# Altium PCB Controller.PcbDoc
Units mm, origin at the board's own origin, x right, y up, seen from the top; angles counter-clockwise.
Board outline 84.93 x 83.99 mm, 2 copper layers (Top Layer, Bottom Layer), stack 1.671 mm thick; 58 components, 38 nets, 184 pads, 51 vias.
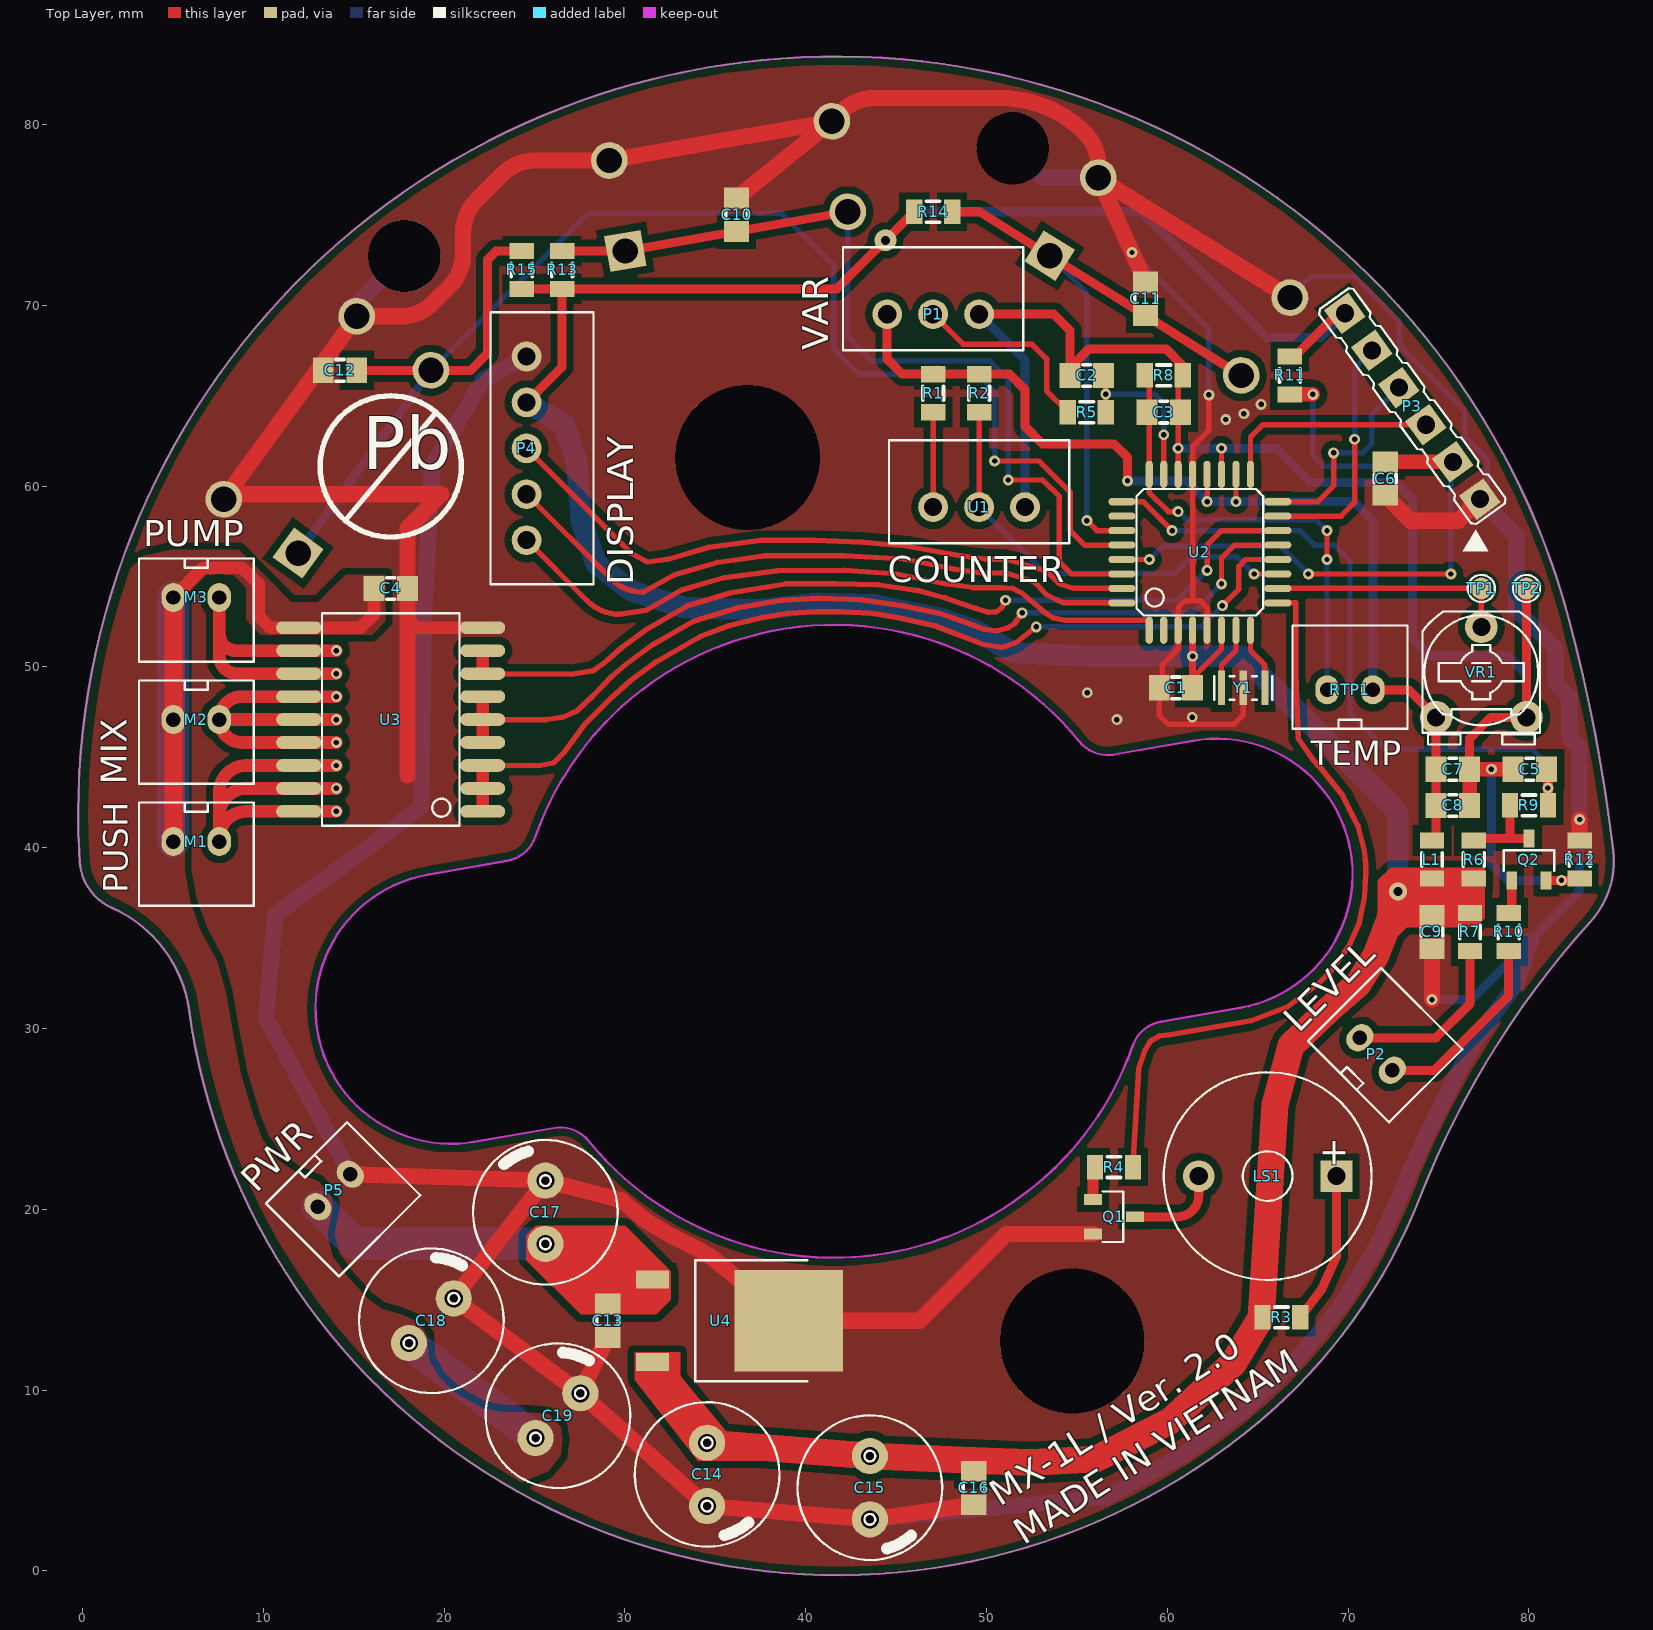
[diagram p0: Top Layer view]
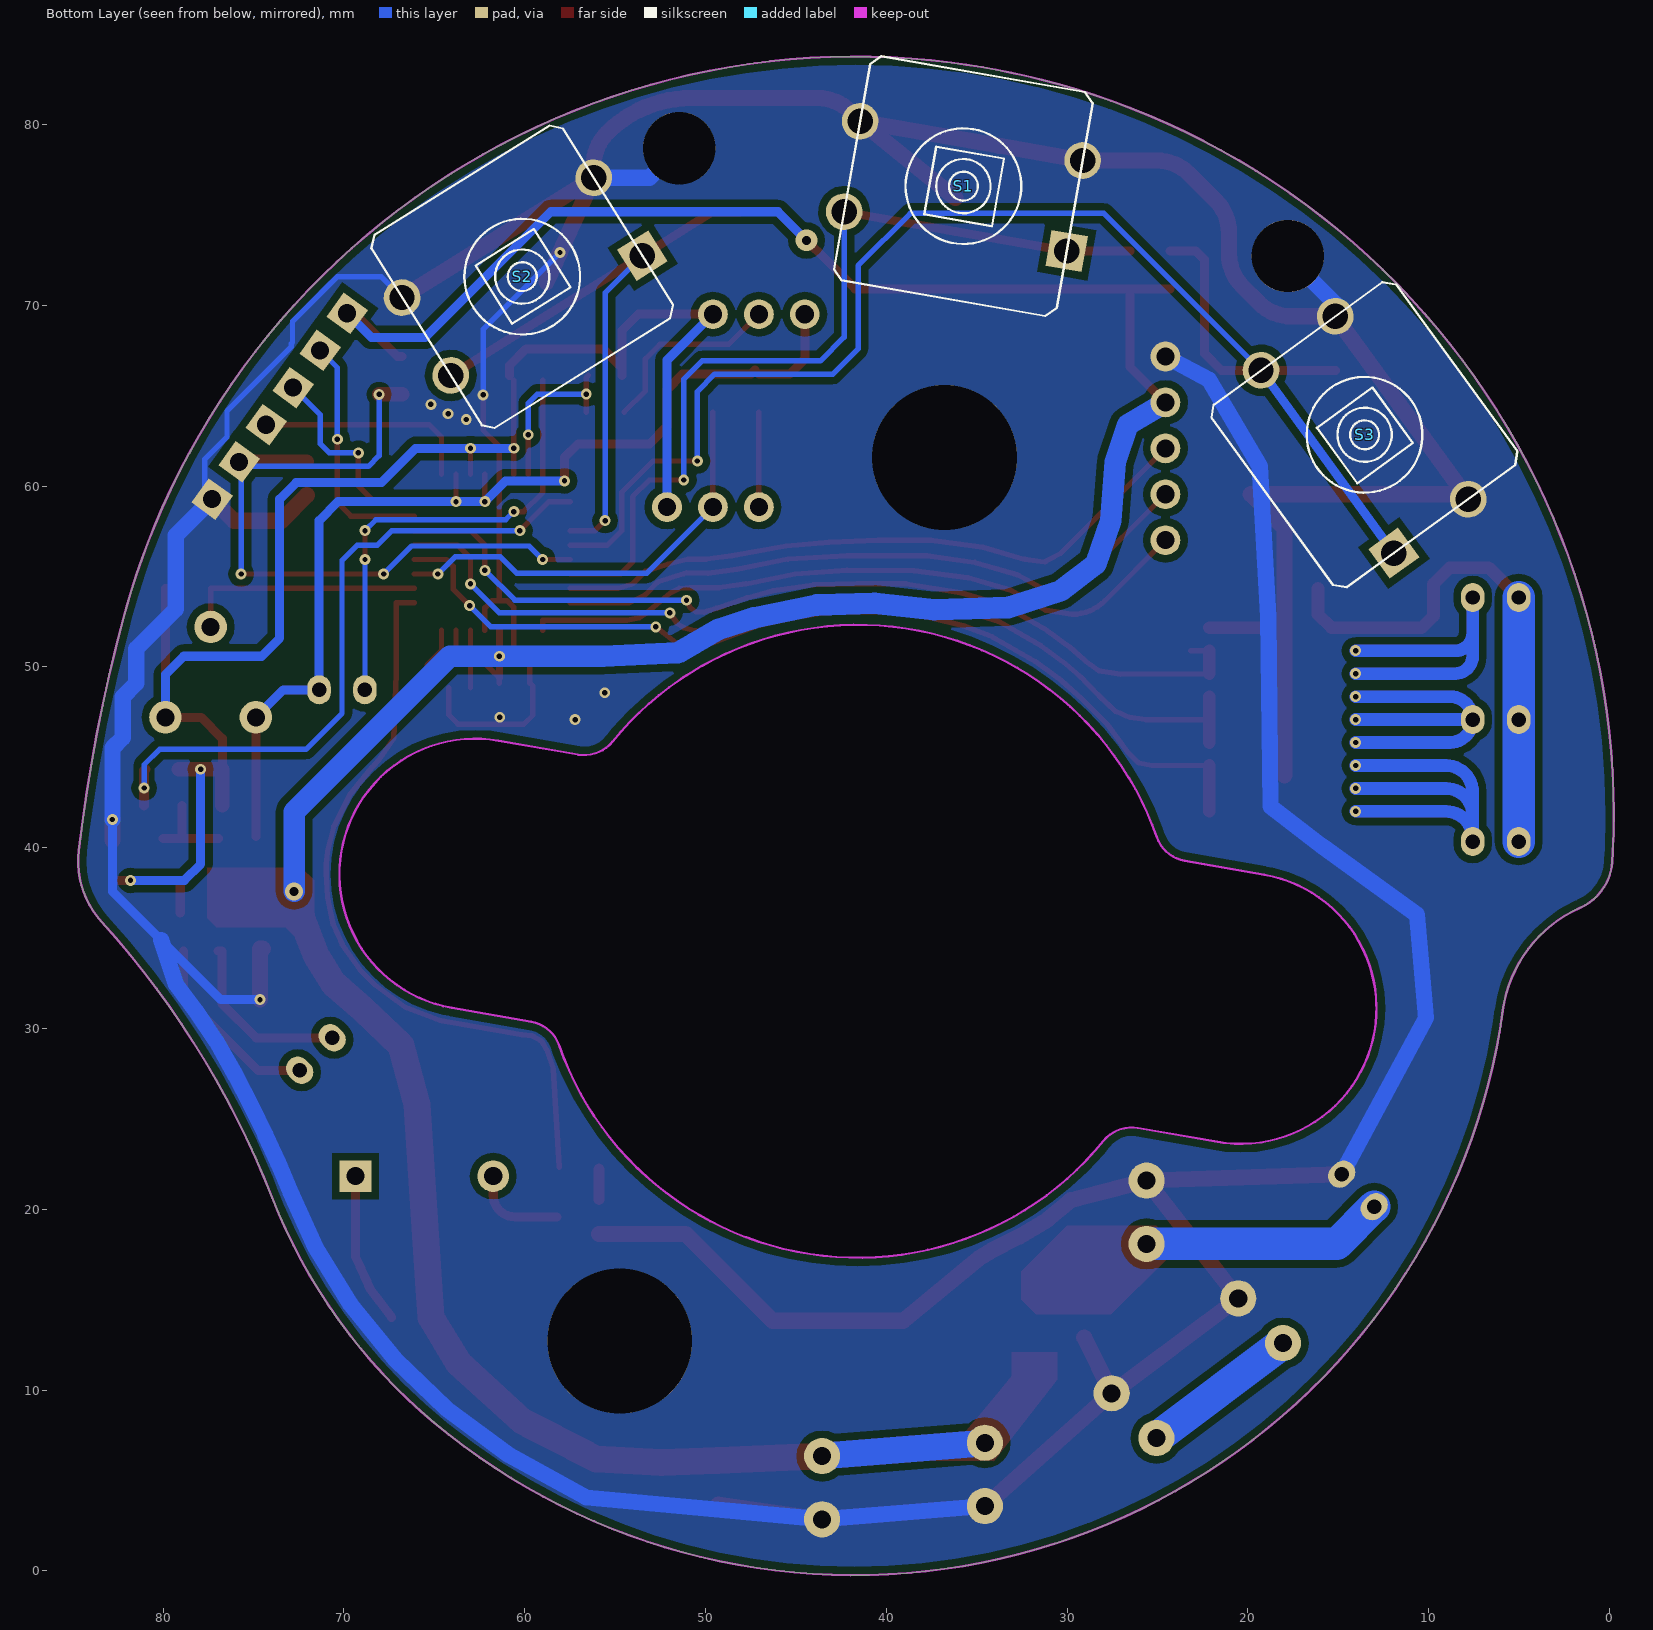
[diagram p1: Bottom Layer view, seen from below]

## Layer stack, top to bottom
Top Solder: solder mask 0.0102, Solder Resist, Dk 3.5
Top Layer: signal copper 0.0356
Dielectric1: dielectric 1.6, FR-4, Dk 4.8
Bottom Layer: signal copper 0.0356
Bottom Solder: solder mask 0.0102, Solder Resist, Dk 3.5

## Board outline
1.622,36.677 cw(c-1.346,29.992) 5.706,31.932 cw(c-1.363,29.992) 5.897,31 ccw(c41.771,35.981) 28.731,2.192 ccw(c41.771,35.981) 64.998,8.192 ccw(c45.151,31.937) 73.975,20.673 cw(c120.149,2.629) 83.399,35.902 ccw(c79.693,39.258) 84.658,39.846 ccw(c-6.031,29.097) 82.208,52.633 ccw(c41.185,41.694) 81.477,55.077 ccw(c41.608,41.836) 80.039,58.804 ccw(c41.69,41.814) 36.399,83.422 ccw(c41.795,41.305) 33.944,83.034 ccw(c41.789,41.313) 31.408,82.477 ccw(c41.678,41.745) 27.587,81.317 ccw(c41.708,41.822) -0.185,39.735 -0.156,39.231 ccw(c2.838,39.419)
cut-out: 24.406,39.689 24.787,40.045 24.99,40.401 25.32,41.264 25.879,42.61 27.149,44.769 28.673,46.649 30.146,48.097 31.949,49.468 34.007,50.611 35.734,51.348 38.299,52.034 40.306,52.288 42.567,52.313 44.726,52.059 47.037,51.45 49.196,50.586 51.253,49.443 53.641,47.513 55.038,45.989 55.394,45.582 55.876,45.303 56.562,45.1 57.349,45.201 61.642,45.938 62.379,46.039 63.953,45.938 65.503,45.531 66.798,44.871 67.967,43.906 68.983,42.687 69.694,41.391 70.1,40.121 70.253,38.572 70.151,37.302 69.745,35.829 69.186,34.66 68.678,33.924 67.916,33.06 66.697,32.171 65.579,31.587 64.487,31.231 60.448,30.515 59.712,30.386 59.356,30.291 58.797,30.012 58.365,29.606 58.088,29.061 57.654,27.929 56.943,26.481 56.486,25.669 55.571,24.322 54.403,22.925 52.752,21.376 51.101,20.157 49.526,19.217 47.545,18.353 45.716,17.795 43.583,17.439 41.474,17.312 39.646,17.439 37.944,17.693 35.963,18.226 34.312,18.938 32.813,19.674 31.01,20.843 29.409,22.24 28.393,23.306 27.809,23.992 27.149,24.399 26.336,24.526 24.228,24.177 21.383,23.662 20.494,23.611 19.199,23.687 17.675,24.119 16.278,24.83 15.109,25.77 14.296,26.735 13.56,27.98 13.179,28.971 12.899,30.418 12.925,31.968 13.306,33.619 14.042,35.117 14.906,36.26 15.846,37.099 16.963,37.784 18.259,38.318 19.478,38.574 21.586,38.943 23.669,39.308 24.075,39.461

## Design rules (kind name [scope] priority, off if disabled: settings)
Clearance [All] p1: gap=0.2
HoleSize [All] p1: absolutevalues=TRUE maxlimit=254 minlimit=0.025 maxpercent=80.000 minpercent=20.000
HoleToHoleClearance [All] p1: gap=0 allowstackedmicrovias=TRUE
MinimumSolderMaskSliver [All] p1: minsoldermaskwidth=0
PlaneConnect [All] p1: planeconnectstyle=Direct reliefexpansion=0.508 reliefentries=4 reliefconductorwidth=0.254 reliefairgap=0.254
PolygonConnect [All] p1: connectstyle=Direct reliefconductorwidth=0.254 reliefentries=4 polygonreliefangle="90 Angle" airgapwidth=0.254
RoutingVias [All] p1: holewidth=0.711 width=1.27 viastyle="Through Hole" minholewidth=0.711 minwidth=1.27 maxholewidth=0.711 maxwidth=1.27
SilkToSilkClearance [All] p1: silktosilkclearance=0
SilkToSolderMaskClearance [IsPad] p1: minsilkscreentomaskgap=0 clearancetoexposedcopper=TRUE
SolderMaskExpansion [All] p1: expansion=0.102
Width [All] p1: maxlimit=5 minlimit=0.2 preferedwidth=0.6
24 further rules are at their usual default settings.

## Components (designator, comment, footprint, x,y, rotation, side; value= is the part's Value field where it differs from the comment)
C1 "0.1uF" C0805 60.471,48.838 r0 top
C2 "0.1uF" C0805 55.546,66.118 r180 top
C3 "0.1uF" C0805 59.796,64.088 r0 top
C4 "0.1uF" C0805 17.046,54.338 r0 top
C5 "0.1uF" C0805 80.046,44.338 r180 top
C6 "0.1uF" C0805 72.046,60.413 r270 top
C7 "0.1uF" C0805 75.789,44.338 r180 top
C8 "10uF" C0805 75.789,42.338 r180 top
C9 "0.1uF" C0805 74.634,35.338 r90 top
C10 "0.1uF" C0805 36.175,75.011 r90 top
C11 "0.1uF" C0805 58.787,70.354 r90 top
C12 "0.1uF" C0805 14.239,66.399 r180 top
C13 "0.1uF" C0805 29.046,13.84 r270 top
C14 "470uF" CAP-8x11.5 34.546,5.338 r270 top
C15 "470uF" CAP-8x11.5 43.546,4.605 r270 top
C16 "0.1uF" C0805 49.296,4.588 r270 top
C17 "470uF" CAP-8x11.5 25.599,19.838 r90 top
C18 "470uF" CAP-8x11.5 19.296,13.838 r45 top
C19 "470uF" CAP-8x11.5 26.296,8.588 r45 top
L1 "10uH" R0805 74.634,39.346 r270 top
LS1 "Buzz" BUZZ 65.546,21.838 r180 top
M1 "PUSH-MOTOR" CONN-2POS-PITCH2.54MM 6.296,40.338 r90 top
M2 "MIX-MOTOR" CONN-2POS-PITCH2.54MM 6.296,47.088 r90 top
M3 "PUMP-MOTOR" CONN-2POS-PITCH2.54MM 6.296,53.838 r90 top
P1 "Header 3" CONN-3POS-PITCH2.54MM 47.046,69.504 r0 top
P2 "AC-PWR" CONN-2POS-PITCH2.54MM 71.546,28.588 r225 top
P3 "Header 6" JP-H6B 75.789,61.338 r126 top
P4 "Display" CONN-5POS-PITCH2.54MM 24.56,62.088 r270 top
P5 "AC-PWR" CONN-2POS-PITCH2.54MM 13.915,21.046 r135 top
Q1 "C1815" SOT-23 57.046,19.588 r270 top
Q2 "C1815" SOT-23 79.996,39.346 r0 top
R1 "220R" R0805 47.046,65.138 r270 top
R2 "10K" R0805 49.586,65.138 r90 top
R3 "220R" R0805 66.306,14.022 r180 top
R4 "1K" R0805 57.046,22.338 r0 top
R5 "10K" R0805 55.546,64.088 r0 top
R6 "2.2K" R0805 76.944,39.346 r90 top
R7 "1M" R0805 76.737,35.338 r90 top
R8 "10K" R0805 59.796,66.118 r180 top
R9 "10K" R0805 79.996,42.338 r0 top
R10 "10K" R0805 78.879,35.338 r90 top
R11 "10K" R0805 66.777,66.118 r90 top
R12 "0" R0805 82.796,39.346 r270 top
R13 "10K" R0805 26.524,71.951 r90 top
R14 "10K" R0805 47.046,75.171 r0 top
R15 "10K" R0805 24.296,71.951 r90 top
RTP1 "10K" CONN-2POS-PITCH2.54MM 70.1,48.732 r270 top
S1 "START" BUTON-B3F 35.734,76.588 r10 bottom
S2 "UP" BUTON-B3F 60.133,71.583 r328 bottom
S3 "DOWN" BUTON-B3F 13.546,62.838 r54 bottom
TP1 "Testpoint" TP-SMD 77.364,54.338 r180 top
TP2 "Testpoint" TP-SMD 79.864,54.338 r270 top
U1 "RPR220" CONN-3POS-PITCH2.54MM 49.586,58.838 r0 top
U2 "ATmega8A-AU" 32-TQFP 61.796,56.338 r0 top
U3 "ULN2803ADW" 18-SOIC-W 17.046,47.088 r90 top
U4 "L7805CD2T-TR" TO-252-3 35.296,13.84 r0 top
VR1 "10K" RPOT-RM065 77.364,49.712 r0 top
Y1 "8MHz" XTA-CSTCE8M00G52-R0 64.196,48.838 r180 top

## Footprints (in the part's own frame and the unit in brackets; to place one, negate y for a bottom-side part, rotate by r counter-clockwise, add the part's x,y. Pads: shape width x height; smd on the part's side, far side on the other; paste and mask are expansions set on the pad)
18-SOIC-W [mm]
  oval 0.7x2.5 smd: 1(-5.08,-5.084) 2(-3.81,-5.084) 3(-2.54,-5.084) 4(-1.27,-5.084) 5(0,-5.084) 6(1.27,-5.084) 7(2.54,-5.084) 8(3.81,-5.084) 9(5.08,-5.084) 10(5.08,5.084) 11(3.81,5.084) 12(2.54,5.084) 13(1.27,5.084) 14(0,5.084) 15(-1.27,5.084) 16(-2.54,5.084) 17(-3.81,5.084) 18(-5.08,5.084)
  silkscreen extent -5.87,-3.8 5.88,3.8, body extent -5.87,-5.34 5.88,5.34, height 2.65
32-TQFP [mm]
  oval 0.4x1.5 smd: 1(-2.8,-4.312) 2(-2,-4.312) 3(-1.2,-4.312) 4(-0.4,-4.312) 5(0.4,-4.312) 6(1.2,-4.312) 7(2,-4.312) 8(2.8,-4.312) 17(2.8,4.312) 18(2,4.312) 19(1.2,4.312) 20(0.4,4.312) 21(-0.4,4.312) 22(-1.2,4.312) 23(-2,4.312) 24(-2.8,4.312)
  oval 1.5x0.4 smd: 9(4.312,-2.8) 10(4.312,-2) 11(4.312,-1.2) 12(4.312,-0.4) 13(4.312,0.4) 14(4.312,1.2) 15(4.312,2) 16(4.312,2.8) 25(-4.312,2.8) 26(-4.312,2) 27(-4.312,1.2) 28(-4.312,0.4) 29(-4.312,-0.4) 30(-4.312,-1.2) 31(-4.312,-2) 32(-4.312,-2.8)
  silkscreen extent -3.5,-3.5 3.5,3.5, body extent -4.51,-4.51 4.51,4.51, height 1.2
BUTON-B3F [mil]
  rect 80x80 hole 55.12: 1(-245.98,100)
  round 80 hole 55.12: 1(245.98,100) 2(-245.98,-100) 2(245.98,-100)
  silkscreen extent -246,-248 246,248, body extent -234,-235 238,237, height 433
BUZZ [mm]
  rect 1.75x1.75 hole 1: 1(-3.81,0)
  round 1.75 hole 1: 2(3.81,0)
  silkscreen extent -5.74,-5.74 5.74,5.74, body extent -5.9,-5.9 5.9,5.9, height 9.5
C0805 [mm] "Chip Capacitor, 2-Leads, Body 2.0x1.3mm, IPC Medium Density"
  rect 1.15x1.4 smd: 1(-0.925,0) 2(0.925,0)
  silkscreen extent -0.22,-0.6 0.23,0.6, body extent -1,-0.62 1,0.63, height 0.5
CAP-8x11.5 [mm]
  round 2 hole 1: 1(-1.75,0) 2(1.75,0)
  silkscreen extent -4,-4 4,4, body extent -3.99,-4 4,4, height 11.5
CONN-2POS-PITCH2.54MM [mm]
  oval 1.6x1.3 hole 0.8: 1(0,-1.27) 2(0,1.27)
  silkscreen extent -3.56,-3.18 2.16,3.17, body extent -3.61,-3.25 2.19,3.25, height 6.8
CONN-3POS-PITCH2.54MM [mil]
  round 65 hole 39.37: 1(-100,0) 2(0,0) 3(100,0)
  silkscreen extent -196,-79 196,146, body extent -196,-79 196,146, height 276
CONN-5POS-PITCH2.54MM [mil]
  round 65 hole 39.37: 1(-200,0) 2(-100,0) 3(0,0) 4(100,0) 5(200,0)
  silkscreen extent -296,-79 296,146, body extent -296,-79 296,146, height 276
JP-H6B [mil]
  rect 65x65 hole 39.37: 1(-100,0) 2(0,0) 3(100,0) 4(200,0) 5(300,0) 6(400,0)
  silkscreen extent -139,-46 439,46, body extent -139,-46 439,46, height 303
R0805 [mm] "Chip Resistor, 2-Leads, Body 2.0x1.3mm, IPC Medium Density"
  rect 0.9x1.35 smd: 1(-1.05,0) 2(1.05,0)
  silkscreen extent -0.38,-0.58 0.38,0.58, body extent -1,-0.62 1,0.63, height 0.5
RPOT-RM065 [mm]
  round 1.8 hole 1: 1(-2.5,-2.5) 2(0,2.5) 3(2.5,-2.5)
  silkscreen extent -3.25,-4 3.25,3.35, body extent -3.25,-4 3.25,3.35, height 7.65
SOT-23 [mm]
  rect 0.6x1 smd: 1(-0.95,-1.154) 2(0.95,-1.154) 3(0,1.154)
  silkscreen extent -1.4,-0.64 1.4,0.51, body extent -1.46,-1.15 1.46,1.15, height 1.22
TO-252-3 [mm] "D-PAK, 3-Pads, Body 6.2x6.7mm (max), IPC Medium Density"
  rect 1.8x1 smd: 1(-3.771,2.28) 3(-3.771,-2.28)
  rect 6x5.6 smd: 2(3.771,0)
  silkscreen extent -1.4,-3.35 4.8,3.35, body extent -4.17,-3.35 5.83,3.35, height 2.55
TP-SMD [mm]
  round 1.2 smd: 1(0,0)
  silkscreen extent -0.75,-0.75 0.75,0.75
XTA-CSTCE8M00G52-R0 [mm]
  rect 0.4x1.9 smd: 1(-1.2,0) 2(0,0) 3(1.2,0)
  silkscreen extent -1.6,-0.65 1.6,0.65, body extent -1.6,-0.65 1.6,0.65, height 0.7

## Part data
C1 C2 C3 C4 C5 C6 C7 C9 C10 C11 C12 C13 C16: library part Cap, "CAP CER 0.1UF 50V 10% X7R 0805"
C8: library part Cap, "CAP CER 10UF 25V 10% X5R 0805"
C14 C15 C17 C18 C19: library part "Cap Pol1", "CAP ALUM 100UF 20% 35V RADIAL"
L1: library part "Inductor Iron", "FERRITE CHIP 10uH 0805"
LS1: library part Speaker, "BUZZER PIEZO 2KHZ 14MM PC MOUNT"
M1 M2 M3: library part "Motor Servo", "Servo Motor"
P1: "Header, 3-Pin"
P2 P5: library part "Header 2", "CONN IDC HOUSING 2POS 20AWG SMD"
P3: "Header, 6-Pin"
P4: library part "Header 5", "Header, 5-Pin"
Q1 Q2: library part NPN, "TRANS NPN 50V 0.15A TO-92"
R1 R3: library part Res1, "220 OHM 1/8W 1% 0805 SMD"
R2 R5 R8 R11: library part Res1, "RES 100 OHM 1W 5% AXIAL"
R4: library part Res1, "1K OHM 1/8W 1% 0805 SMD"
R6: library part Res1, "RES SMD 2.2K OHM 1% 1/8W 0805"
R7: library part Res1, "RES SMD 1M OHM 1% 1/8W 0805"
R9 R10: library part Res1, "RES 10K OHM 1/8W .1% 0805 SMD"
R12: library part Res1, "RES SMD 0.0 OHM JUMPER 1/8W 0805"
R13 R14 R15: library part Res1, "RES 10K OHM 1/8W 1% 0805 SMD"
RTP1: library part "Res Thermal", "THERMISTOR 10K OHM 40MM L NTC"
S1 S2 S3: library part SW-PB, "SWITCH TACTILE SPST-NO 0.05A 12V"
TP1 TP2: library part TP1
U1: "PHOTOINTERRUPTER REFL 6MM 800NM"
U2: "IC MCU 8BIT 8KB FLASH 32TQFP"
U3: library part ULN2803LW, "TRANS 8NPN DARL 50V 0.5A 18SO"
U4: library part MC7805CT, "IC REGULATOR POS 5V D2PAK"
VR1: library part RPot, "TRIMMER 10K OHM 0.5W TH"
Y1: library part XTAL-CSTCE8M00G52-R0, "CER RESONATOR 20.0MHZ SMD"

## Free pads (board coordinates)
  round 4 hole 4: 0(17.796,72.722) 1(51.449,78.689)
  round 8 hole 8: 2(36.775,61.584) 3(54.733,12.715)

## Via types
v1: diameter 0.6, hole 0.3, Top Layer to Bottom Layer, 49 vias
v2: diameter 1.2, hole 0.5, Top Layer to Bottom Layer, 1 vias
v3: diameter 1, hole 0.5, Top Layer to Bottom Layer, 1 vias

## Nets (pads, with @x,y where several pads share a name; then routed paths per layer and width w, separated by ;. In a path a pad name is that pad's centre, name@x,y a point inside that pad or via, vN(x,y) a via of type N, cw(c..) or ccw(c..) an arc to the next point about the centre after c; other vN are vias at no path point)
+5V: C1.2 C9.2 C14.1 C15.1 C16.1 L1.2 P3.6 P4.2 R3.2 R6.1 R7.2 R11.2 R13.1 R14.1 R15.1 U2.4 U2.6 U4.3 | length 216.8
  Top Layer w0.3: C1.2@61.396,49.088 61.396,49.388 62.996,50.988 U2.6
  Top Layer w0.4: C1.2@61.396,49.388 v1(61.396,50.588) U2.4
  Top Layer w0.5: R15.1 R13.1 ; P4.2 26.524,66.592 R13.1 ; R14.1 41.726,70.901 R13.1 ; R11.2 67.037,67.168 69.426,69.557 P3.6 ; v3(72.746,37.588) 73.309,37.588 ; C9.2 73.309,37.588 ; R7.2@76.944,36.388 R6.1 L1.2 73.925,37.588 73.309,37.588
  Top Layer w0.8: U4.3 C14.1 ; R3.2@65.18,14.022 R3.2
  Top Layer w1.5: C14.1 39.046,6.721 C15.1 49.321,6.117 52.446,5.988 56.029,6.188 58.717,7.559 60.146,8.288 63.646,11.488 65.18,14.022 65.181,14.027 65.256,15.185 65.946,25.788 66.846,29.061 68.954,31.082 70.579,32.488 71.543,34.056 72.331,36.088 72.432,37.608 v3@72.444,37.788
  Bottom Layer w0.5: v2(44.413,73.588) 45.996,75.171 58.546,75.171 65.498,68.219 68.48,68.219 P3.6
  Bottom Layer w1.2: P4.2 26.646,63.388 27.334,61.338 27.587,58.088 28.42,55.688 30.346,54.215 33.246,53.288 37.346,53.152 40.646,53.511 43.846,53.421 47.336,52.706 49.249,52.089 50.628,51.295 51.533,50.775 55.646,50.588 v1(61.396,50.588) 64.148,50.588 72.746,41.989 v3(72.746,37.588)
  Bottom Layer w1.5: C14.1 C15.1
+12V: C4.1 C13.1 C17.1 C18.1 C19.1 M1.2 M2.2 M3.2 P5.2 U3.10 U4.1 | length 71.9
  Top Layer w0.7: M3.2 6.677,55.489 8.83,55.489 9.731,54.588 9.731,52.816 10.379,52.168 U3.10 15.38,52.168 16.121,52.908 C4.1
  Top Layer w1: M1.2 M2.2 M3.2 ; C17.1 29.557,18.088 U4.1
  Bottom Layer w1.8: M1.2 M2.2 M3.2 ; P5.2 15.078,18.088 C17.1 ; C18.1 C19.1
+AVDD: C7.2 C8.2 L1.1 P1.1 R1.1 R2.2 RTP1.2 U2.18 U2.20 VR1.1 | length 62.1
  Top Layer w0.3: v1(62.196,59.138) U2.20 ; v1(63.796,59.138) U2.18
  Top Layer w0.5: P1.1 44.506,67.028 45.346,66.188 R1.1 ; R1.1@47.268,66.409 47.49,66.188 R2.2 51.276,66.188 52.126,65.338 52.126,63.301 53.09,62.338 57.046,62.338 57.796,61.588 v1(57.796,60.288) ; RTP1.2 73.344,48.732 VR1.1 C7.2 C8.2 L1.1@74.864,40.626
  Bottom Layer w0.5: v1(57.796,60.288) 61.046,60.288 v1(62.196,59.138) v1(63.796,59.138) 70.324,59.138 71.37,58.091 RTP1.2 73.344,48.732 VR1.1
AGND: C2.2 C3.2 C5.2 C7.1 C8.1 P1.3 Q2.2 R8.1 R12.2 TP2.1 U1.3 U2.19 U2.22 VR1.3 | length 93.3
  Top Layer w0.3: U2.22 v1(60.596,62.088) R8.1@60.596,65.868 ; U2.19 v1(62.996,62.088)
  Top Layer w0.5: P1.3 53.712,69.504 54.621,68.595 C2.2@54.621,66.543 ; C2.2 C2.2@54.621,66.543 ; R8.1 60.846,66.666 59.925,67.588 55.665,67.588 C2.2@54.621,66.543 ; C7.1 76.714,46.03 77.896,47.212 VR1.3 TP2.1 ; Q2.2 R12.2@82.692,38.192
  Top Layer w0.8: C8.1 C7.1 C5.2
  Bottom Layer w0.5: P1.3 52.126,66.964 U1.3 ; v1(60.596,62.088) v1(62.996,62.088) 66.027,62.088 67.927,60.188 72.634,60.188 73.546,59.276 73.546,51.588 74.546,50.588 78.853,50.588 79.864,49.576 VR1.3 ; v1(77.918,44.338) 77.918,39.095 78.82,38.192 v1(81.796,38.192)
BUZZ: R4.2 U2.9 | length 41
  Top Layer w0.3: R4.2 58.412,27.768 58.769,28.822 59.068,29.312 59.574,29.59 60.146,29.649 64.6,30.425 66.635,31.19 68.249,32.385 69.099,33.235 70.084,34.639 70.579,35.743 70.903,37.264 70.982,38.588 70.982,39.088 70.903,39.798 70.546,41.188 69.694,42.888 68.45,44.437 68.042,44.883 67.246,46.039 67.096,49.588 67.096,53.538 U2.9
DATA: P4.3 U2.31 | length 36.1
  Top Layer w0.3: P4.3 30.346,56.288 31.246,55.8 32.346,55.946 34.646,56.612 37.546,57.008 40.446,57.008 43.146,56.888 45.546,56.688 48.546,56.147 49.946,55.964 50.946,55.964 52.046,55.688 53.342,55.283 54.042,54.583 54.846,54.338 U2.31
DOWN: C11.1 R14.2 S2.1 U2.27 | length 36.3
  Top Layer w0.3: v1(55.546,58.088) 56.096,57.538 U2.27
  Top Layer w0.5: R14.2 49.598,75.171 53.488,72.74 C11.1 S2.1@64.085,66.118
  Bottom Layer w0.3: S2.1@53.488,72.74 55.546,70.682 v1(55.546,58.088)
GND: C1.1 C4.2 C6.2 C9.1 C10.2 C11.2 C12.2 C13.2 C14.2 C15.2 C16.2 C17.2 C18.2 C19.2 P3.1 P4.1 P5.1 pad.0 pad.1 pad.2 pad.3 Q1.2 R12.1 S1.2 S2.2 S3.2 U2.3 U2.5 U2.21 U3.9 U4.2 Y1.2 | length 439.7
  Top Layer w0.3: U2.5 62.196,53.267 61.796,53.667 61.386,53.667 ; v1(62.296,65.043) 62.296,63.088 61.396,62.188 U2.21 61.396,53.677 61.386,53.667 ; Y1.2 64.196,47.338 63.696,46.838 60.034,46.838 59.546,47.325 C1.1 59.546,48.938 59.712,49.103 59.712,50.104 60.596,50.989 U2.3 60.596,53.288 60.976,53.667 61.386,53.667
  Top Layer w0.7: 17.971,52.675 18.479,52.168 U3.9
  Top Layer w0.9: P5.1 C17.2 ; 17.971,44.009 17.971,52.675 C4.2 17.971,57.671 19.848,59.548 8.09,59.548 7.819,59.276 13.105,66.551 15.164,69.385 17.592,69.385 ccw(c17.592,71.925) 19.388,70.129 20.302,71.044 ccw(c18.506,72.84) 21.046,72.84 21.046,74.014 cw(c23.586,74.014) 21.79,75.81 23.24,77.26 cw(c25.036,75.464) 25.036,78.004 29.14,78.004 33.785,78.823 S1.2@41.446,80.174 ; C13.2 C19.2 ; C10.2 S1.2@41.446,80.174 ; C16.2 C15.2 C14.2 C19.2 ; Q1.2 51.087,18.638 46.29,13.84 U4.2 34.895,17.276 34.206,17.7 32.666,18.478 31.096,19.413 29.806,20.496 C17.2 ; C11.2 S2.2@56.18,77.048 ; S2.2@66.777,70.426 S2.2@56.18,77.048 ; C6.2 73.446,58.088 76.087,58.088 P3.1 ; C9.1@74.484,34.413 C9.1 v1(74.634,31.598) ; R12.1 v1(82.796,41.559) ; C17.2 C18.2 C19.2 ; S1.2@41.446,80.174 41.985,80.713 cw(c43.781,78.917) 43.781,81.457 50.795,81.457 cw(c50.795,74.893) 55.436,79.534 cw(c53.64,77.738) 56.18,77.738 S2.2@56.18,77.048
  Bottom Layer w0.3: v1(58.046,72.918) 62.296,68.668 v1(62.296,65.043) ; S2.2@66.777,70.426 67.939,71.588 70.359,71.588 72.837,69.11 72.837,67.948 72.913,67.871 72.913,67.694 76.462,64.145 76.462,62.711 77.683,61.491 77.683,59.683 P3.1
  Bottom Layer w0.5: v1(74.634,31.598) 76.807,31.598 80.096,34.888 82.796,37.588 v1(82.796,41.559)
  Bottom Layer w0.9: P5.1 10.146,30.588 10.646,36.288 15.846,40.045 18.746,42.288 18.868,52.788 19.346,61.088 22.146,65.888 P4.1 ; S3.2@15.164,69.385 15.164,70.089 pad.0 ; C14.2 C15.2 56.587,4.06 60.888,6.428 64.34,8.98 67.146,11.687 69.624,14.731 71.536,17.843 72.981,21.018 73.621,22.53 74.349,24.139 75.128,25.724 75.971,27.388 77.048,29.286 78.136,30.898 79.304,32.477 80.096,34.888 ; pad.2@34.739,59.548 pad.2 ; pad.1 53.09,77.048 S2.2@56.18,77.048 ; P3.1 79.296,57.269 79.296,53.182 81.477,51.001 81.477,49.088 82.229,48.336 82.229,46.078 82.796,45.511 v1(82.796,41.559)
  other v1: 57.205,47.088 61.377,47.212 55.571,48.566 63.225,63.682 64.231,64.001 65.188,64.518
M1: U2.12 U3.1 U3.2 U3.3 | length 52.3
  Top Layer w0.3: U3.3 25.282,44.548 26.046,44.688 26.647,45.287 27.787,46.836 29.208,48.257 30.304,49.229 31.735,50.289 34.149,51.672 35.742,52.275 37.546,52.71 39.046,52.973 40.546,53.06 41.946,53.06 43.646,52.973 45.122,52.71 47.131,52.275 49.832,51.236 50.846,51.078 51.646,51.348 v1(52.746,52.212) ; v1(63.046,53.388) 63.953,54.295 63.953,55.559 64.332,55.938 U2.12
  Top Layer w0.7: U3.1 U3.2 U3.3
  Bottom Layer w0.3: v1(52.746,52.212) 61.87,52.212 v1(63.046,53.388)
M2: U2.13 U3.4 U3.5 U3.6 | length 51.5
  Top Layer w0.3: U3.5 25.646,47.088 26.546,47.212 27.344,47.553 28.25,48.43 28.817,49.01 29.27,49.463 30.074,50.159 31.416,51.148 33.803,52.527 36.252,53.266 38.663,53.677 40.746,53.788 43.046,53.713 45.346,53.388 47.346,52.973 49.046,52.388 49.836,52.088 50.546,51.988 51.196,52.161 51.546,52.388 v1(51.965,52.988) ; v1(62.996,54.588) 62.996,56.01 63.724,56.738 U2.13
  Top Layer w0.7: U3.4 U3.5 U3.6
  Bottom Layer w0.3: v1(51.965,52.988) 61.396,52.988 v1(62.996,54.588)
M3: U2.14 U3.7 U3.8 | length 50.5
  Top Layer w0.3: U3.7 27.046,49.588 28.25,49.788 29.01,50.348 29.844,51.09 31.096,52.008 33.452,53.382 35.874,54.103 38.898,54.588 38.946,54.595 41.436,54.592 41.644,54.588 44.046,54.532 46.246,54.215 47.718,53.813 49.405,53.231 50.098,53.025 50.546,53.06 50.846,53.266 v1(51.046,53.688) ; U3.8 U3.8@23.168,50.898 ; v1(62.196,55.338) 62.196,56.738 62.996,57.538 U2.14
  Top Layer w0.7: U3.7 U3.8
  Bottom Layer w0.3: v1(51.046,53.688) 60.546,53.688 v1(62.196,55.338)
MISO: P3.4 U2.16 | length 11.3
  Top Layer w0.3: U2.16 68.333,59.138 69.197,60.002 v1(69.197,61.838)
  Bottom Layer w0.3: v1(69.197,61.838) 70.796,61.838 71.296,62.338 71.296,63.94 P3.4
MOSI: P3.5 U2.15 | length 13.4
  Top Layer w0.3: U2.15 69.608,58.338 70.352,59.081 v1(70.352,62.588)
  Bottom Layer w0.3: v1(70.352,62.588) 70.352,66.544 P3.5
NetC2_1: C2.1 R5.2 U2.23 | length 9.4
  Top Layer w0.3: C2.1 56.596,65.993 v1(56.596,65.088) R5.2 ; U2.23 v1(59.796,62.838)
  Bottom Layer w0.3: v1(56.596,65.088) 59.296,65.088 59.796,64.588 v1(59.796,62.838)
NetC5_1: C5.1 R9.2 U2.25 | length 37.9
  Top Layer w0.3: U2.25 58.66,59.138 v1(60.26,57.538)
  Top Layer w0.55: C5.1 81.046,44.263 v1(81.046,43.3) R9.2
  Bottom Layer w0.3: v1(60.26,57.538) 67.346,57.538 68.146,56.738 69.256,56.738 70.1,55.893 70.1,47.434 72.092,45.442 80.191,45.442 81.046,44.588 v1(81.046,43.3)
NetLS1_1: LS1.1 R3.1 | length 8.4
  Top Layer w0.5: R3.1 68.546,15.588 69.356,17.388 LS1.1
NetLS1_2: LS1.2 Q1.3 | length 5.3
  Top Layer w0.5: Q1.3 60.546,19.588 ccw(c60.546,20.778) 61.324,19.877 ccw(c60.546,20.778) 61.446,19.999 ccw(c60.546,20.778) 61.736,20.778 LS1.2
NetM1_1: M1.1 U3.16 U3.17 U3.18 | length 49.2
  Top Layer w0.7: M1.1 M1.1@7.566,40.509 ; v1(14.042,42.008) U3.18 9.065,42.008 ccw(c9.065,40.509) M1.1@7.566,40.509 ; v1(14.042,43.278) U3.17 9.065,43.278 ccw(c9.065,41.779) 7.566,41.779 ; v1(14.042,44.548) U3.16 9.065,44.548 ccw(c9.065,43.049) 7.566,43.049 7.566,41.779 ; M1.1@7.566,40.509 7.566,41.779
  Bottom Layer w0.7: v1(14.042,42.008) 11.962,42.008 9.065,42.008 ccw(c9.065,40.509) 7.566,40.509 7.566,41.779 ; v1(14.042,43.278) 11.962,43.278 9.065,43.278 ccw(c9.065,41.779) 7.566,41.779 ; v1(14.042,44.548) 11.962,44.548 9.065,44.548 ccw(c9.065,43.049) 7.566,43.049 7.566,41.779
NetM2_1: M2.1 U3.13 U3.14 U3.15 | length 41.8
  Top Layer w0.7: v1(14.042,45.818) U3.15 8.836,45.818 cw(c8.836,47.088) M2.1 ; v1(14.042,47.088) U3.14 M2.1 ; v1(14.042,48.358) U3.13 8.836,48.358 ccw(c8.836,47.088) M2.1
  Bottom Layer w0.7: v1(14.042,45.818) 11.962,45.818 8.836,45.818 cw(c8.836,47.088) M2.1 ; v1(14.042,47.088) 11.962,47.088 M2.1 ; v1(14.042,48.358) 11.962,48.358 8.836,48.358 ccw(c8.836,47.088) M2.1
NetM3_1: M3.1 U3.11 U3.12 | length 35.3
  Top Layer w0.7: M3.1 7.566,51.838 ; v1(14.042,49.628) U3.12 8.546,49.628 cw(c8.546,50.608) 7.566,50.608 7.566,51.838 ; v1(14.042,50.898) U3.11 8.506,50.898 cw(c8.506,51.838) 7.566,51.838
  Bottom Layer w0.7: 7.566,52.578 7.566,50.608 ccw(c8.546,50.608) 8.546,49.628 v1(14.042,49.628) ; M3.1 7.566,51.868 ccw(c8.546,51.868) 8.546,50.888 v1@14.042,50.888
NetP1_2: P1.2 R5.1 | length 10.7
  Top Layer w0.3: P1.2 48.713,67.838 52.519,67.838 53.325,67.031 53.325,65.259 R5.1
NetP2_1: P2.1 R7.1 | length 10
  Top Layer w0.5: P2.1 74.844,29.486 76.737,31.378 R7.1 R7.1@76.944,34.288
NetP2_2: P2.2 R10.1 | length 10.7
  Top Layer w0.5: P2.2@72.364,27.77 P2.2@72.444,27.77 ; P2.2 74.748,27.689 78.879,31.82 R10.1
NetQ1_1: Q1.1 R4.1 | length 1.7
  Top Layer w0.6: Q1.1 R4.1@55.892,22.234
NetQ2_1: Q2.1 R10.2 | length 1.8
  Top Layer w0.5: R10.2@79.046,36.388 Q2.1
NetQ2_3: Q2.3 R6.2 R9.1 | length 4.9
  Top Layer w0.5: R6.2@76.937,40.5 79.046,40.5 ; R9.1 78.946,40.6 79.046,40.5 ; Q2.3 79.046,40.5
NetR1_2: R1.2 U1.1 | length 5.3
  Top Layer w0.3: U1.1 R1.2
NetR2_1: R2.1 U1.2 U2.11 | length 24.1
  Top Layer w0.3: U1.2 R2.1 ; v1(64.796,55.138) U2.11
  Bottom Layer w0.3: U1.2 53.236,55.188 60.446,55.188 61.346,56.088 63.846,56.088 v1(64.796,55.138)
NetTP1_1: TP1.1 U2.10 VR1.2 | length 13.4
  Top Layer w0.3: U2.10 TP1.1 VR1.2
NetU2_7: U2.7 Y1.3 | length 3.5
  Top Layer w0.3: Y1.3 62.996,50.104 63.796,50.904 U2.7
NetU2_8: U2.8 Y1.1 | length 3.5
  Top Layer w0.3: U2.8 64.596,50.904 65.396,50.104 Y1.1
OVERHEATING: C3.1 R8.2 RTP1.1 U2.24 | length 25.7
  Top Layer w0.3: R8.2@58.996,65.868 U2.24 58.996,59.649 60.058,58.588 v1(60.596,58.588) ; v1(68.83,55.938) v1(68.83,57.538)
  Bottom Layer w0.3: v1(60.596,58.588) 61.046,58.138 68.23,58.138 v1(68.83,57.538) ; RTP1.1 v1(68.83,55.938)
RST: C6.1 P3.2 R11.1 U2.29 | length 41.7
  Top Layer w0.3: U2.29 v1(59.006,55.938) ; v1(67.796,55.138) v1(75.679,55.138)
  Top Layer w0.8: R11.1 v1(68.046,65.068) ; C6.1 P3.2
  Bottom Layer w0.3: v1(59.006,55.938) 59.756,56.688 66.246,56.688 v1(67.796,55.138) ; v1(68.046,65.068) 68.046,61.688 68.647,61.088 75.539,61.088 P3.2@75.679,61.227 ; v1(75.679,55.138) P3.2@75.679,61.227 ; P3.2 P3.2@75.679,61.227
SCK: P3.3 U2.17 | length 12
  Top Layer w0.3: U2.17 64.596,62.706 65.282,63.392 P3.3
SCLK: P4.4 U2.32 | length 36
  Top Layer w0.3: P4.4 29.253,54.855 ccw(c31.004,56.606) 31.004,54.13 32.748,55.092 35.115,55.776 37.746,56.145 39.746,56.138 42.146,56.147 45.438,55.964 48.246,55.406 49.846,55.188 51.046,55.199 51.197,55.161 52.646,54.688 53.325,53.988 54.239,53.538 U2.32
START: C10.1 R13.2 S1.1 U2.30 | length 49
  Top Layer w0.3: v1@51.146,60.338 53.106,60.338 54.027,59.417 54.027,55.8 54.689,55.138 U2.30
  Top Layer w0.5: R13.2 30.022,73.001 C10.1 S1.1@42.328,75.171
  Bottom Layer w0.3: S1.1@42.328,75.171 42.328,68.237 43.638,66.928 50.186,66.928 51.196,65.918 51.196,60.388 v1@51.146,60.338
  other v1: 51.196,60.338
STR: P4.5 U2.1 | length 37.7
  Top Layer w0.3: P4.5 27.916,53.652 ccw(c29.712,55.448) 29.712,52.908 31.181,53.128 33.1,54.237 35.496,54.94 38.453,55.326 42.146,55.338 45.046,55.138 47.746,54.588 49.246,54.388 50.846,54.388 51.446,54.338 51.946,54.088 53.246,52.988 53.646,52.71 54.341,52.588 58.996,52.588 U2.1
UP: C12.1 R15.2 S3.1 U2.28 | length 83
  Top Layer w0.3: v1(50.446,61.388) 52.905,61.388 54.627,59.665 54.627,57.538 55.427,56.738 U2.28
  Top Layer w0.5: C12.1 19.273,66.399 21.461,66.399 22.399,67.338 22.399,72.522 22.878,73.001 R15.2
  Bottom Layer w0.3: S3.1@19.273,66.399 27.962,75.088 38.663,75.088 41.557,72.193 41.557,67.588 42.957,66.188 49.486,66.188 50.446,65.228 v1(50.446,61.388)
  Bottom Layer w0.5: S3.1@11.928,56.29 S3.1@19.273,66.399
pads on no net: U2.2 U2.26

## Polygon pours and split planes (outlines as drawn)
GND on Top Layer "Top Layer-No Net" (solid, remove dead copper, pour order 6): -1.954,85.088 85.546,85.088 85.546,-2.412 -1.954,-2.412
+12V on Top Layer "Top Layer-No Net" (solid, remove dead copper, pour order 2): 22.346,4.088 25.746,5.513 26.446,6.388 26.546,7.288 26.446,7.988 25.746,8.688 24.56,8.788 23.346,8.788 22.13,8.988 20.646,9.825 19.746,10.688 19.146,11.688 19.046,13.088 18.546,13.788 17.611,14.188 16.546,14.488 15.746,15.088 14.646,16.288 13.846,17.388 13.546,18.582 13.746,19.694 13.846,20.188 13.746,20.688 13.046,21.541 11.846,22.03 10.746,22.773 9.946,23.888 9.446,25.188 8.746,27.488 8.246,30.088 7.946,31.888 7.446,33.688 6.546,35.388 5.946,36.988 5.646,38.758 5.646,41.288 5.646,53.888 6.546,54.788 6.846,55.088 7.246,55.088 8.346,55.088 8.746,54.688 9.046,54.388 9.046,53.788 9.046,52.612 9.446,52.212 9.87,51.788 10.746,51.788 16.022,51.788 16.446,52.212 16.746,52.512 16.746,53.713 16.746,55.088 14.546,55.088 13.546,54.088 13.046,53.588 12.346,53.588 11.546,53.588 10.046,55.088 8.646,56.488 4.846,56.488 3.396,56.138 1.646,54.488 0.946,52.088 0.346,49.288 -0.154,45.688 -0.354,41.988 -0.254,39.888 -0.254,38.758 0.346,37.388 1.146,36.788 2.746,35.888 4.046,34.688 4.846,33.588 5.446,32.388 5.746,30.788 6.146,28.588 6.846,25.888 8.046,22.488 9.346,19.588 10.746,16.988 13.946,12.488 17.646,8.788 22.546,5.088 23.546,4.588
GND on Bottom Layer "Top Layer-No Net" (solid, remove dead copper, pour order 4): -1.954,85.088 85.546,85.088 85.546,-2.412 -1.954,-2.412

## Keep-outs
Keep-Out Layer:
  lines w0.127: -0.185,39.735 cw(c41.708,41.822) 27.587,81.317 ; -0.185,39.735 cw(c41.708,41.822) 27.587,81.317 ; -0.185,39.735 -0.156,39.231 ; -0.185,39.735 -0.156,39.231 ; -0.156,39.231 ccw(c2.838,39.419) 1.622,36.677 ; -0.156,39.231 ccw(c2.838,39.419) 1.622,36.677 ; 1.622,36.677 cw(c-1.346,29.992) 5.706,31.932 ; 1.622,36.677 cw(c-1.346,29.992) 5.706,31.932 ; 5.706,31.932 cw(c-1.363,29.992) 5.897,31 ; 5.706,31.932 cw(c-1.363,29.992) 5.897,31 ; 5.897,31 ccw(c41.771,35.981) 28.731,2.192 ; 5.897,31 ccw(c41.771,35.981) 28.731,2.192 ; 19.094,38.507 ccw(c20.387,31.119) 21.679,23.731 ; 19.094,38.507 ccw(c20.387,31.119) 21.679,23.731 ; 19.094,38.507 23.498,39.277 ; 19.094,38.507 23.498,39.277 ; 21.679,23.731 26.083,24.502 ; 21.679,23.731 26.083,24.502 ; 23.498,39.277 ccw(c23.153,41.247) 25.041,40.589 ; 23.498,39.277 ccw(c23.153,41.247) 25.041,40.589 ; 25.041,40.589 cw(c41.565,34.825) 55.149,45.857 ; 25.041,40.589 cw(c41.565,34.825) 55.149,45.857 ; 26.083,24.502 cw(c26.428,22.532) 27.98,23.793 ; 26.083,24.502 cw(c26.428,22.532) 27.98,23.793 ; 27.587,81.317 cw(c41.678,41.745) 31.408,82.477 ; 27.587,81.317 cw(c41.678,41.745) 31.408,82.477 ; 27.98,23.793 ccw(c41.565,34.825) 58.088,29.061 ; 27.98,23.793 ccw(c41.565,34.825) 58.088,29.061 ; 28.731,2.192 ccw(c41.771,35.981) 64.998,8.192 ; 28.731,2.192 ccw(c41.771,35.981) 64.998,8.192 ; 31.408,82.477 cw(c41.789,41.313) 33.944,83.034 ; 31.408,82.477 cw(c41.789,41.313) 33.944,83.034 ; 33.944,83.034 cw(c41.795,41.305) 36.399,83.422 ; 33.944,83.034 cw(c41.795,41.305) 36.399,83.422 ; 36.399,83.422 cw(c41.69,41.814) 80.039,58.804 ; 36.399,83.422 cw(c41.69,41.814) 80.039,58.804 ; 55.149,45.857 ccw(c56.702,47.118) 57.047,45.148 ; 55.149,45.857 ccw(c56.702,47.118) 57.047,45.148 ; 57.047,45.148 61.45,45.919 ; 57.047,45.148 61.45,45.919 ; 58.088,29.061 cw(c59.977,28.402) 59.632,30.373 ; 58.088,29.061 cw(c59.977,28.402) 59.632,30.373 ; 59.632,30.373 64.036,31.143 ; 59.632,30.373 64.036,31.143 ; 61.45,45.919 cw(c62.743,38.531) 64.036,31.143 ; 61.45,45.919 cw(c62.743,38.531) 64.036,31.143 ; 64.998,8.192 ccw(c45.151,31.937) 73.975,20.673 ; 64.998,8.192 ccw(c45.151,31.937) 73.975,20.673 ; 73.975,20.673 cw(c120.149,2.629) 83.399,35.902 ; 73.975,20.673 cw(c120.149,2.629) 83.399,35.902 ; 80.039,58.804 cw(c41.608,41.836) 81.477,55.077 ; 80.039,58.804 cw(c41.608,41.836) 81.477,55.077 ; 81.477,55.077 cw(c41.185,41.694) 82.208,52.633 ; 81.477,55.077 cw(c41.185,41.694) 82.208,52.633 ; 82.208,52.633 cw(c-6.031,29.097) 84.658,39.846 ; 82.208,52.633 cw(c-6.031,29.097) 84.658,39.846 ; 83.399,35.902 ccw(c79.693,39.258) 84.658,39.846 ; 83.399,35.902 ccw(c79.693,39.258) 84.658,39.846

## Other copper
Top Layer:
  region net +5V: 30.546,12.088 30.546,10.588 34.046,6.08 37.746,6.088 35.546,7.788 33.646,10.088 33.046,10.788 33.046,12.088
  region net +12V: 30.021,19.088 32.546,16.563 32.546,14.988 31.746,14.188 27.546,14.188 24.546,17.188 24.546,18.575 25.059,19.088
  region net +5V: 72.346,38.888 71.646,38.188 71.646,35.372 72.331,34.688 73.231,35.588 77.047,35.588 77.547,36.088 77.547,38.865 77.569,38.888

## Silkscreen, mask and mechanical layers (free items; w line width, h text height)
Top Overlay:
  circle w0.3: c17.046,61.088 r3.905
  region: 77.046,57.588 77.746,56.388 76.346,56.388
  lines w0.3: 14.52,58.088 19.561,64.075
  text "VAR" at 41.746,67.502 h2.5 r90
  text "Pb" at 15.467,59.957 h5
  text "PUMP" at 3.367,56.188 h2.5
  text "DISPLAY" at 30.946,54.528 h2.5 r90
  text "COUNTER" at 44.546,54.188 h2.5
  text "TEMP" at 67.92,44.129 h2.3
  text "MIX" at 2.946,43.469 h2.5 r90
  text "PUSH" at 2.946,37.472 h2.3 r90
  text "LEVEL" at 67.62,29.362 h2.5 r45
  text "PWR" at 9.965,20.506 h2.5 r45
  text "MX-1L / Ver. 2.0 / MADE IN VIETNAM" at 52.346,0.988 h2.5 r32.46
Top Solder:
  rectangle: 47.046,9.083 49.546,12.415
  rectangle: 43.546,9.115 46.046,12.447
  rectangle: 47.046,13.311 49.546,16.643
  rectangle: 43.546,13.343 46.046,16.675

## Text inside footprints (layer, text, board x,y; h text height)
LS1: Top Overlay "+" at 68.594,23.997 h1.52 r270